# Altium PCB PCB.PcbDoc (part 1 of 2)
Units mil, origin at the board's own origin, x right, y up, seen from the top; angles counter-clockwise.
Board outline 6000 x 4000 mil, 2 copper layers (Top Layer, Bottom Layer); 94 components, 44 nets, 296 pads, 0 vias.
Unrouted connection lines stored in the file: 197.
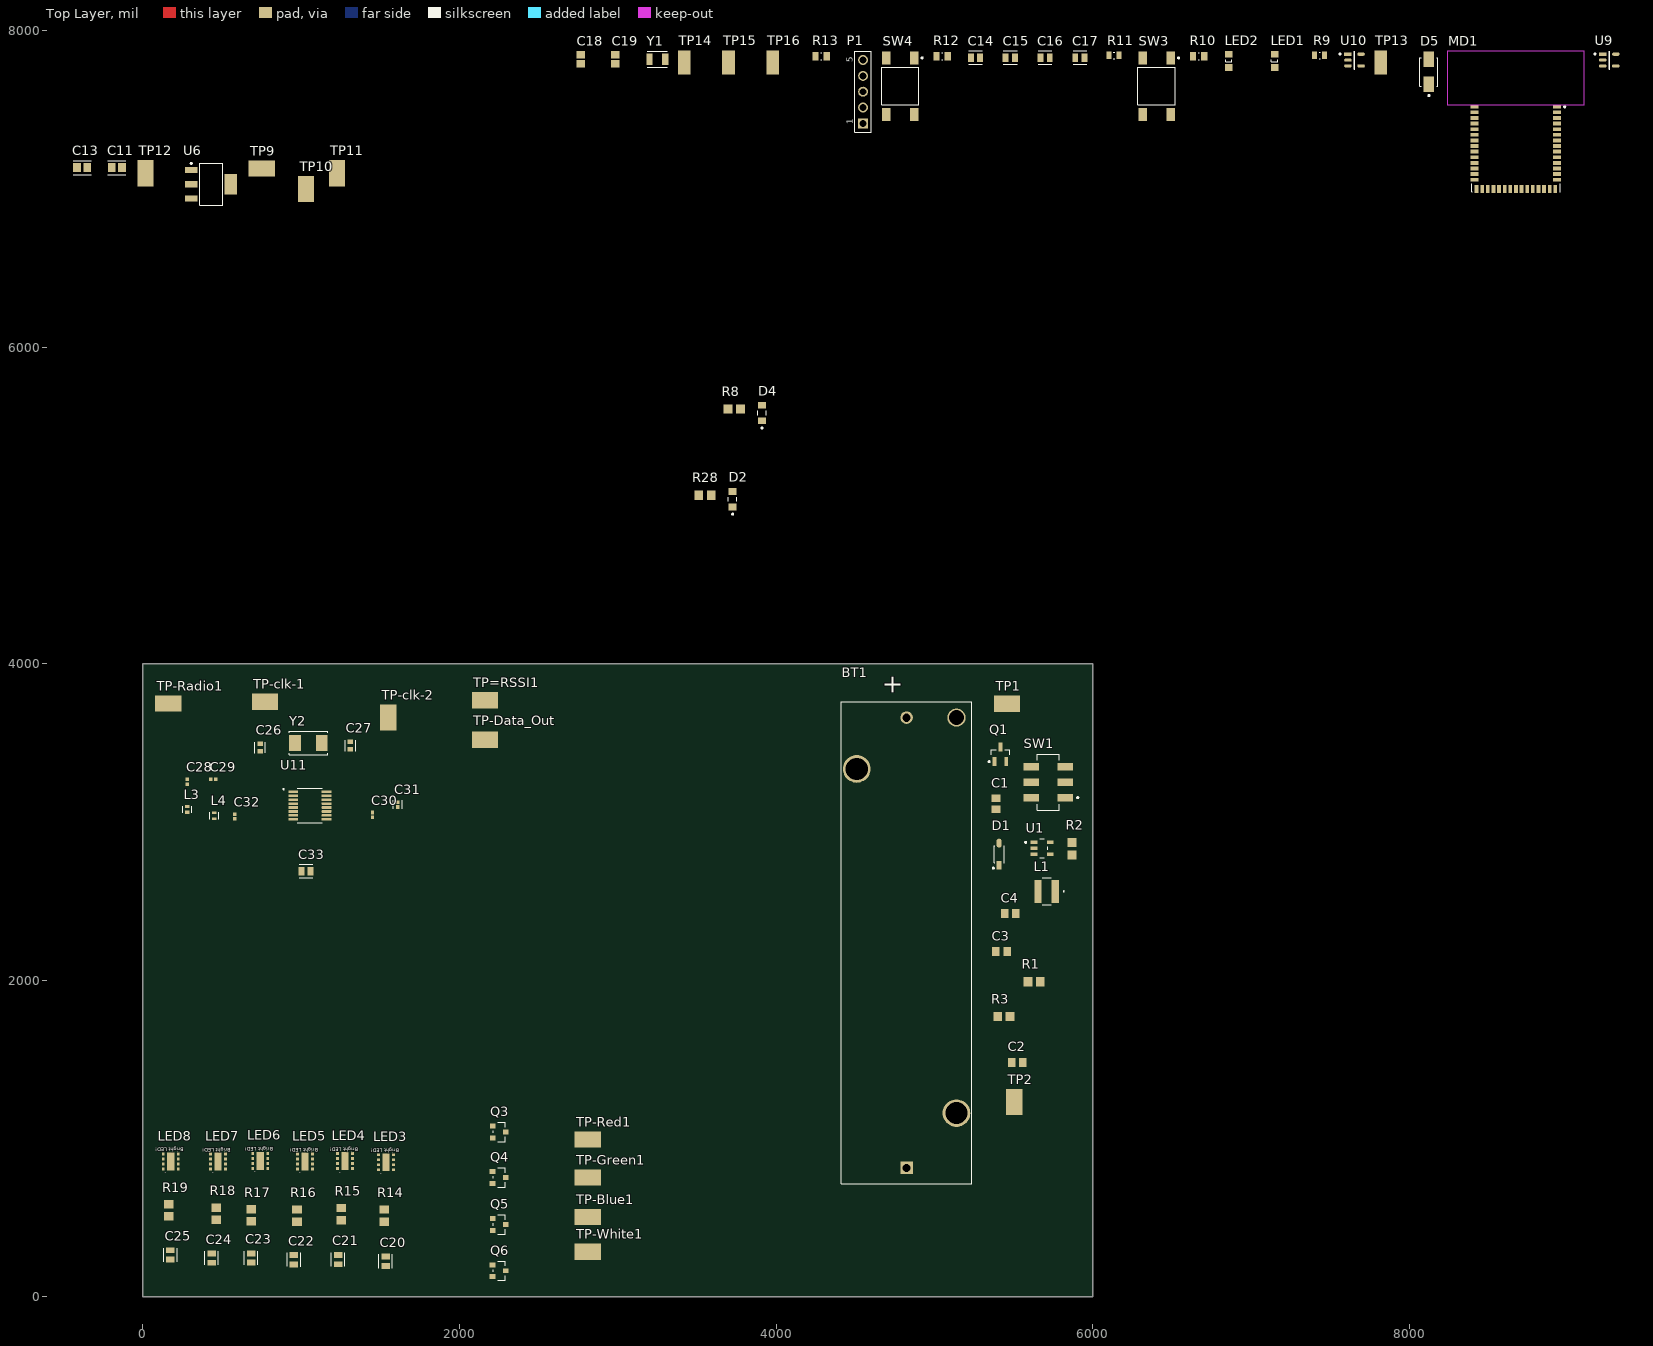
[diagram p0: Top Layer view]
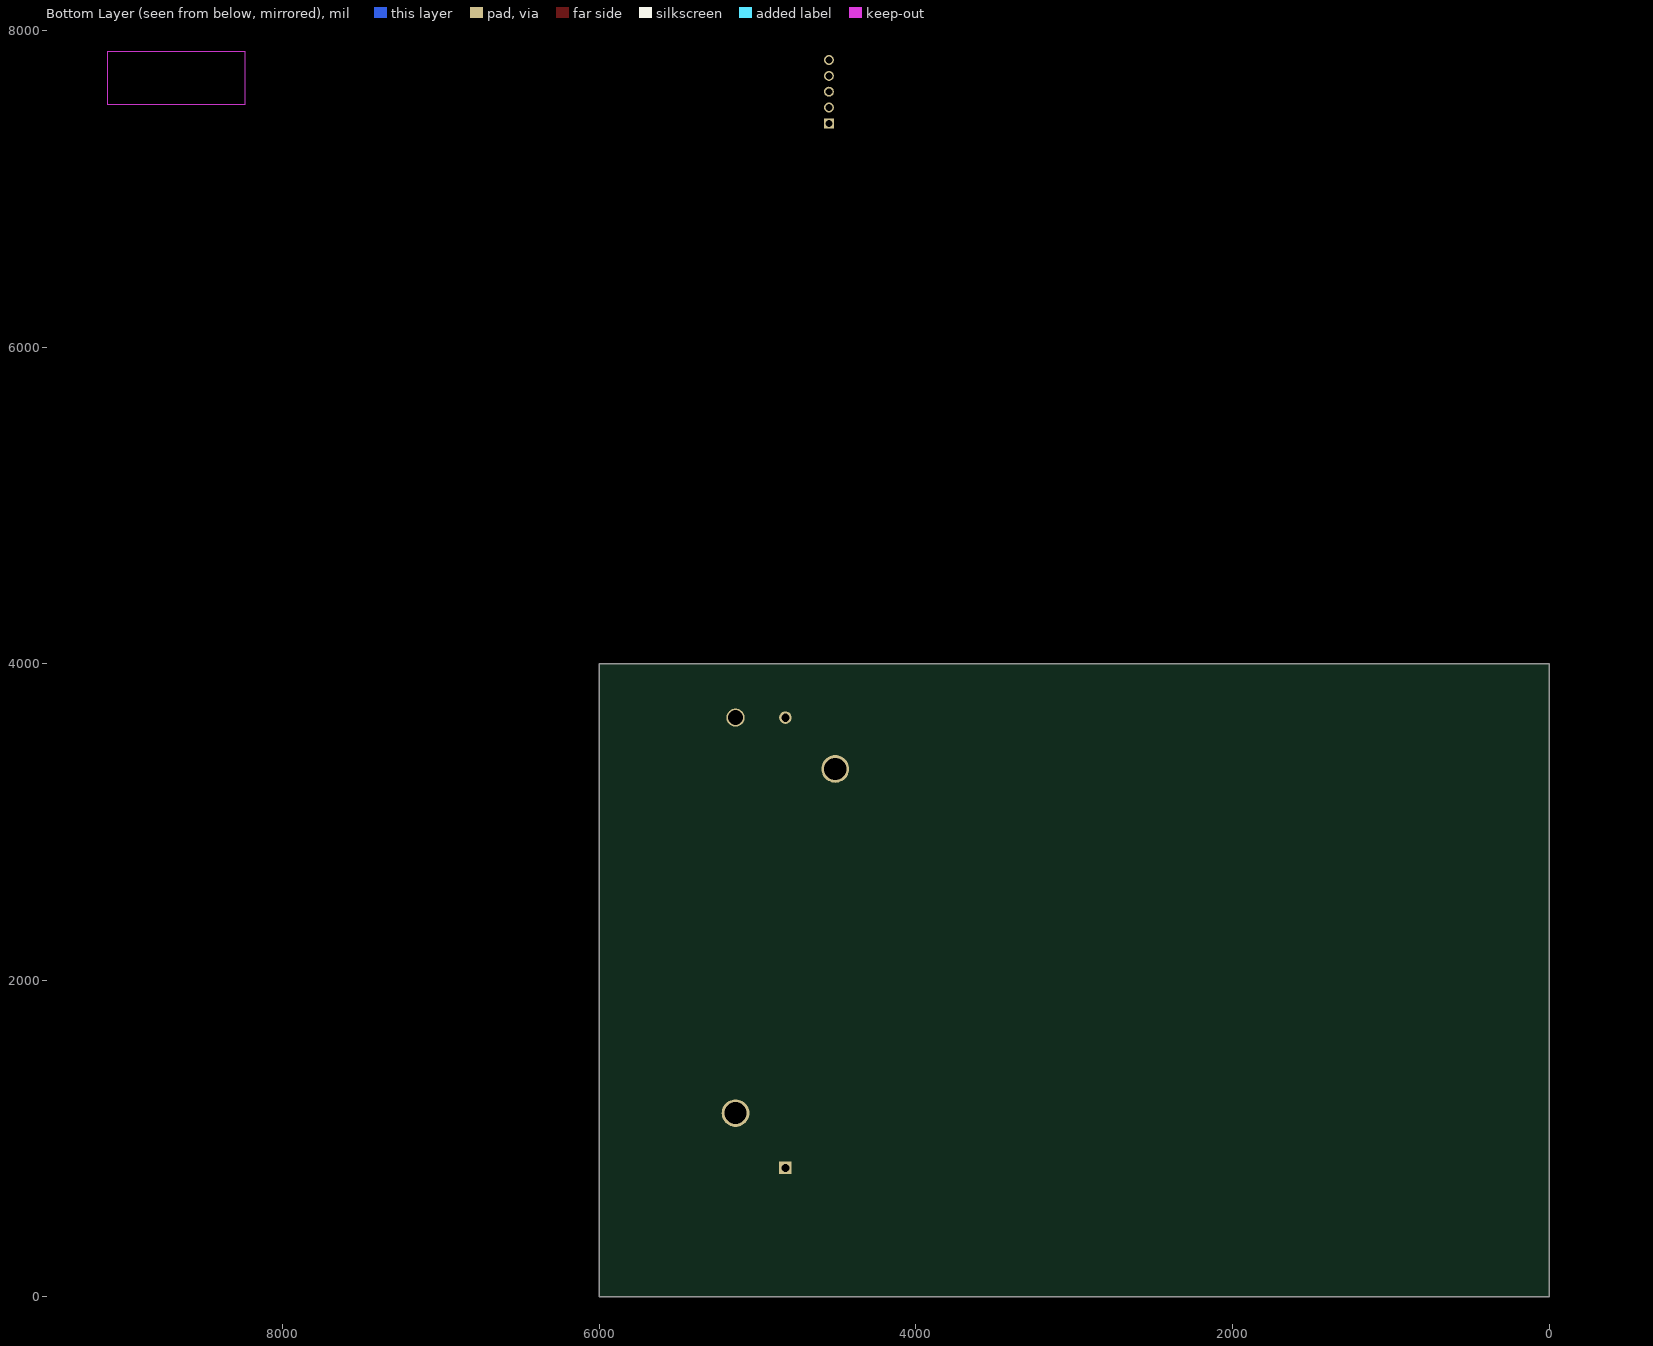
[diagram p1: Bottom Layer view, seen from below]

## Layer stack, top to bottom
Top Solder: solder mask 0.4, Solder Resist, Dk 3.5
Top Layer: signal copper 1.4
Dielectric 1: dielectric 12.6, FR-4, Dk 4.8
Bottom Layer: signal copper 1.4
Bottom Solder: solder mask 0.4, Solder Resist, Dk 3.5

## Board outline
0,0 6000,0 6000,4000 0,4000

## Design rules (kind name [scope] priority, off if disabled: settings)
Clearance [All] p1: gap=10 ignorepadtopadclearanceinfootprint=FALSE except(0: Arc-Hole Track-Hole SMDPad-Hole THPad-Hole Via-Hole Fill-Hole Poly-Hole Region-Hole Text-Hole)
PolygonConnect [All] p1: connectstyle=Relief reliefconductorwidth=10 reliefentries=4 polygonreliefangle="90 Angle" airgapwidth=10
RoomDefinition LED_array [InComponentClass('LED_array')] p1: confinementstyle=ConfineIn formatcopy=TRUE lockcomponents=FALSE outline 24.53,30.2 3350,30.2 3350,1255.2 24.53,1255.2
RoomDefinition 03-5V_To_3V3 [InComponentClass('03-5V_To_3V3')] p2: confinementstyle=ConfineIn formatcopy=TRUE lockcomponents=FALSE outline -465,6870 1390,6870 1390,7290 -465,7290
RoomDefinition 02-Power_5v0 [InComponentClass('02-Power_5v0')] p3: confinementstyle=ConfineIn formatcopy=TRUE lockcomponents=FALSE outline 4390.08,702.42 5945.08,702.42 5945.08,3992.42 4390.08,3992.42
RoomDefinition Receiver [InComponentClass('Receiver')] p4: confinementstyle=ConfineIn formatcopy=TRUE lockcomponents=FALSE outline 10,2589.65 2740,2589.65 2740,3994.65 10,3994.65
RoomDefinition 05-5V_Monitor [InComponentClass('05-5V_Monitor')] p5: confinementstyle=ConfineIn formatcopy=TRUE lockcomponents=FALSE outline 3640.63,5475 4005.63,5475 4005.63,5770 3640.63,5770
RoomDefinition 04-3V3_Monitor [InComponentClass('04-3V3_Monitor')] p6: confinementstyle=ConfineIn formatcopy=TRUE lockcomponents=FALSE outline 3455.63,4930 3820.63,4930 3820.63,5225 3455.63,5225
RoomDefinition 02-MCU [InComponentClass('02-MCU')] p7: confinementstyle=ConfineIn formatcopy=TRUE lockcomponents=FALSE outline 2725,6960 9345,6960 9345,7985 2725,7985
RoutingVias [All] p1: holewidth=28 width=50 viastyle="Through Hole" minholewidth=28 minwidth=50 maxholewidth=28 maxwidth=50
SolderMaskExpansion [All] p1: expansion=4 istentingtop=FALSE
Width [All] p1: maxlimit=10 minlimit=10 preferedwidth=10
30 further rules are at their usual default settings.

## Classes and differential pairs
component class Receiver: C26 C27 C28 C29 C30 C31 C32 C33 L3 L4 RX_ANT1 TP-clk-1 TP-clk-2 TP-Data_Out TP-Radio1 TP=RSSI1 U11 Y2
component class LED_array: C20 C21 C22 C23 C24 C25 LED3 LED4 LED5 LED6 LED7 LED8 Q3 Q4 Q5 Q6 R14 R15 R16 R17 R18 R19 TP-Blue1 TP-Green1 TP-Red1 TP-White1
component class 05-5V_Monitor: D4 R8 U8
component class 04-3V3_Monitor: D2 R28 U?
component class 03-5V_To_3V3: C11 C12 C13 TP9 TP10 TP11 TP12 U6
component class 02-Power_5v0: BT1 C1 C2 C3 C4 D1 L1 Q1 R1 R2 R3 SW1 TP1 TP2 U1
component class 02-MCU: C14 C15 C16 C17 C18 C19 D5 LED1 LED2 MD1 P1 R9 R10 R11 R12 R13 SW3 SW4 TP13 TP14 TP15 TP16 U9 U10 Y1

## Components (designator, comment, footprint, x,y, rotation, side; value= is the part's Value field where it differs from the comment)
BT1 "1043" Keystone_1043_0 4825,2237.5 r90 top
C1 "CAP_0805_U_010_00" CAP_0805 5390.08,3116.56 r90 top value=10µF
C2 "CAP_0805_U_010_00" CAP_0805 5524.65,1481.36 r0 top value=10µF
C3 "CAP_0805_N_001_80" CAP_0805 5424.65,2181.99 r0 top
C4 "CAP_0805_U_010_00" CAP_0805 5480.08,2421.99 r180 top value=10µF
C11 "CL21A106KQCLNNC" FP-CL21-IPC_B -165,7135 r0 top
C13 "CL21A106KQCLNNC" FP-CL21-IPC_B -385,7135 r0 top
C14 "C0805C106K8PACTU" FP-C0805C-DG-MFG 5260,7830 r0 top value=10uF
C15 "C0805C106K8PACTU" FP-C0805C-DG-MFG 5480,7830 r0 top value=10uF
C16 "C0805C104K5RACTU" FP-C0805C-DN-MFG 5700,7830 r0 top value="0.10 μF"
C17 "C0805C104K5RACTU" FP-C0805C-DN-MFG 5920,7830 r0 top value="0.10 μF"
C18 "08055A6R0CAT2A" CAPC2013X94X50LL20T25 2765,7820 r90 top
C19 "08055A6R0CAT2A" CAPC2013X94X50LL20T25 2985,7820 r90 top
C20 "10uF" FP-C0805C-DG-MFG 1533.39,225.67 r270 top
C21 "10uF" FP-C0805C-DG-MFG 1233.39,235.67 r270 top
C22 "10uF" FP-C0805C-DG-MFG 953.39,235.2 r270 top
C23 "10uF" FP-C0805C-DG-MFG 683.39,245.67 r270 top
C24 "10uF" FP-C0805C-DG-MFG 433.39,245.2 r270 top
C25 "10uF" FP-C0805C-DG-MFG 173.39,265.2 r270 top
C26 "10pF" FP-C0603C-CF-MFG 740,3471.02 r90 top value="10 pF"
C27 "10pF" FP-C0603C-CF-MFG 1310,3483.62 r270 top value="10 pF"
C28 "1.2pF" CAPC1005X55X25LL05T10 280,3255.35 r90 top
C29 "1.2pF" CAPC1005X55X25LL05T10 444.65,3270 r0 top
C30 "0.1uF" CAPC1005X56X25LL10T15 1450,3045.35 r270 top
C31 "4.7uF" FP-C1005-050-0_15-IPC_C 1610,3110 r270 top
C32 "0.1uF" CAPC1005X56X25LL10T15 580,3035.35 r270 top
C33 "10uF" FP-C0805C-DG-MFG 1030,2690 r0 top
D1 "SM5817PL-TP" On_Semiconductor_425-04_IPC_A 5409.45,2797.42 r90 top
D2 "LTST-C171KGKT" FP-LTST-C171KGKT-MFG 3725.63,5040 r90 top
D4 "LTST-C171KGKT" FP-LTST-C171KGKT-MFG 3910.63,5585 r90 top
D5 "B140-13-F" FP-SMA-MFG 8125,7740 r90 top
L1 "NRS4018T2R2MDGJ" IND_TAIYO_NRS4018_TAY 5710.08,2562.42 r180 top
L3 "77nH" FP-LQW15CN_10-MFG 280,3080 r90 top
L4 "39nH" FP-LQW15AN_80-MFG 450,3040 r90 top
LED1 "150080RS75000" 0805_A 7150,7810 r90 top
LED2 "150080GS75000" 0805_A 6860,7810 r90 top
LED3 "QLSP06RGBXWAJ" QLSP06RGBXWAJ 1544.02,900.16 r180 top
LED4 "QLSP06RGBXWAJ" QLSP06RGBXWAJ 1284.02,907.17 r180 top
LED5 "QLSP06RGBXWAJ" QLSP06RGBXWAJ 1031.26,904.41 r180 top
LED6 "QLSP06RGBXWAJ" QLSP06RGBXWAJ 748.5,908.66 r180 top
LED7 "QLSP06RGBXWAJ" QLSP06RGBXWAJ 481.26,904.41 r180 top
LED8 "QLSP06RGBXWAJ" QLSP06RGBXWAJ 183.39,905.2 r180 top
MD1 "CYBLE-416045-02" FP-CYBLE-416045-02-MFG 8675,7350 r0 top
P1 "61300511121" 61300511121 4550,7615 r90 top
Q1 "SSM3J328R,LF" SOT-23_M 5417.48,3428.25 r90 top
Q3 "SSM3K329R,LF" FP-2-3Z1A-MFG 2251.34,1042.6 r0 top
Q4 "SSM3K329R,LF" FP-2-3Z1A-MFG 2250,755.2 r0 top
Q5 "SSM3K329R,LF" FP-2-3Z1A-MFG 2251.34,457.8 r0 top
Q6 "SSM3K329R,LF" FP-2-3Z1A-MFG 2250,165.2 r0 top
R1 "30K" RES_0805 5630.71,1991.99 r180 top
R2 "RES_0805_K_010.00" RES_0805 5870.08,2831.99 r90 top
R3 "RES_0805_K_010.00" RES_0805 5439.45,1771.99 r180 top
R8 "330" RES_0805 3735.63,5610 r0 top
R9 "RC0805FR-07330RL" RESC2013X60X35LL10T20 7435,7845 r0 top
R10 "RC0805FR-0710KL" RESC2013X60X35NL10T20 6670,7840 r0 top
R11 "RC0805FR-07330RL" RESC2013X60X35LL10T20 6135,7845 r0 top
R12 "RC0805FR-0710KL" RESC2013X60X35NL10T20 5050,7840 r0 top
R13 "RC0805FR-0710KL" RESC2013X60X35NL10T20 4285,7840 r0 top
R14 "10Ohm" RESC2013X50X40ML20T20 1523.39,513.58 r90 top
R15 "10Ohm" RESC2013X50X40ML20T20 1253.39,523.58 r90 top
R16 "10Ohm" RESC2013X50X40ML20T20 973.39,513.58 r90 top
R17 "10Ohm" RESC2013X50X40ML20T20 683.39,515.2 r90 top
R18 "10Ohm" RESC2013X50X40ML20T20 463.39,525.2 r90 top
R19 "10Ohm" RESC2013X50X40ML20T20 163.39,546.81 r90 top
R28 "330" RES_0805 3550.63,5065 r0 top
SW1 "JS202011SCQN" C&K_Components_0_MFG 5720.08,3251.99 r90 top
SW3 "FSM4JSMA" TECO-FSM4JSMA_V 6405,7650 r0 top
SW4 "FSM4JSMA" TECO-FSM4JSMA_V 4785,7650 r0 top
TP1 "TP_1206" TP-SMC-1206 5459.45,3747.42 r0 top
TP2 "TP_1206" TP-SMC-1206 5504.65,1231.36 r90 top
TP9 "TP_1206" TP-SMC-1206 750,7130 r0 top
TP10 "TP_1206" TP-SMC-1206 1030,7000 r90 top
TP11 "TP_1206" TP-SMC-1206 1225,7100 r90 top
TP12 "TP_1206" TP-SMC-1206 15,7100 r90 top
TP13 "5019" KSTN-5019_V 7820,7800 r90 top
TP14 "5019" KSTN-5019_V 3420,7800 r90 top
TP15 "5019" KSTN-5019_V 3700,7800 r90 top
TP16 "5019" KSTN-5019_V 3980,7800 r90 top
TP-Blue1 "TP_1206" TP-SMC-1206 2810,505.2 r180 top
TP-clk-1 "TP_1206" TP-SMC-1206 770,3760 r180 top
TP-clk-2 "TP_1206" TP-SMC-1206 1550,3660 r90 top
TP-Data_Out "TP_1206" TP-SMC-1206 2160,3520 r180 top
TP-Green1 "TP_1206" TP-SMC-1206 2810,755.2 r180 top
TP-Radio1 "TP_1206" TP-SMC-1206 160,3750 r0 top
TP-Red1 "TP_1206" TP-SMC-1206 2810,995.2 r180 top
TP-White1 "TP_1206" TP-SMC-1206 2810,285.2 r180 top
TP=RSSI1 "TP_1206" TP-SMC-1206 2160,3770 r180 top
U1 "LM2735XMF-NOPB" Texas_Instruments_DBV0005A_0 5681.26,2834.59 r0 top
U6 "TLV1117LV33DCYT" DCY0004A_M 430,7030 r0 top
U9 "SN74AHC1G08DBV3" FP-DBV0005A-IPC_C 9265,7815 r0 top
U10 "SN74AHC1G08DBV3" FP-DBV0005A-IPC_C 7655,7815 r0 top
U11 "MICRF220AYQS" SOP63P600X175-16N 1055,3104.65 r0 top
Y1 "32.768KHZ" FP-ABS07-120-MFG 3250,7820 r0 top
Y2 "9.81563MHz" FP-ABM7-MFG 1044.79,3499.65 r0 top

## Footprints (in the part's own frame and the unit in brackets; to place one, negate y for a bottom-side part, rotate by r counter-clockwise, add the part's x,y. Pads: shape width x height; smd on the part's side, far side on the other; paste and mask are expansions set on the pad)
0805_A [mm] "Chip LED, 2-Leads, Body 2.0x1.3mm, IPC Medium Density"
  rect 1.1x1.2 smd: 1(-1.05,0) 2(1.05,0)
  silkscreen extent -0.15,-0.5 0.15,0.5, body extent -1,-0.62 1,0.63, height 0.68
61300511121 [mm] "Pin Header, pitch 2.54 mm, THT, Vertical, single row, 5p"
  rect 1.6x1.6 hole 1.1: 1(-5.08,0)
  round 1.6 hole 1.1: 2(-2.54,0) 3(0,0) 4(2.54,0) 5(5.08,0)
  silkscreen extent -6.5,-1.35 6.5,1.35, body extent -6.35,-1.27 6.35,1.27, height 8.57
C&K_Components_0_MFG [mm]
  rect 1.2x2.5 smd paste+0 mask+0: 1(-2.5,-2.75) 2(0,-2.75) 3(2.5,-2.75) 4(-2.5,2.75) 5(0,2.75) 6(2.5,2.75)
  silkscreen extent -4.5,-4.85 4.5,1.8, body extent -4.5,-3.75 4.5,3.75, height 5.51
CAP_0805 [mm]
  rect 1.2x1.4 smd: 1(-0.9,0) 2(0.9,0)
  body extent -1.07,-0.7 1.07,0.7, height 0.7
CAPC1005X55X25LL05T10 [mm] "Chip Capacitor, 2-Leads, Body 1.00x0.50mm, IPC High Density"
  rect 0.56x0.52 smd: 1(-0.39,0) 2(0.39,0)
  body extent -0.53,-0.28 0.53,0.28, height 0.55
CAPC1005X56X25LL10T15 [mm] "Chip Capacitor, 2-Leads, Body 1.00x0.50mm, IPC High Density"
  rect 0.58x0.54 smd: 1(-0.39,0) 2(0.39,0)
  body extent -0.55,-0.3 0.55,0.3, height 0.56
CAPC2013X94X50LL20T25 [mm] "Chip Capacitor, 2-Leads, Body 2.01x1.25mm, IPC High Density"
  rect 1.15x1.35 smd: 1(-0.725,0) 2(0.725,0)
  body extent -1.1,-0.72 1.1,0.72, height 0.94
DCY0004A_M [mm] "SOT223, 4-Leads, Body 6.7x3.7mm, Pitch 2.3mm, IPC Low Density"
  rrect10% 2.05x1 smd: 1(-3.175,2.3) 2(-3.175,0) 3(-3.175,-2.3)
  rrect5% 2.05x3.25 smd: 4(3.175,0)
  silkscreen extent -3.3,-3.35 1.85,3.47, body extent -3.5,-3.25 3.5,3.25, height 1.62
FP-2-3Z1A-MFG [mm]
  rect 0.9x0.8 smd paste+0 mask+0: 1(-1.05,0.95) 2(-1.05,-0.95) 3(1.05,0)
  silkscreen extent -0.95,-1.55 0.95,1.55, body extent -1.6,-1.65 1.6,1.65, height 0.25
FP-ABM7-MFG [mm]
  rect 1.9x2.6 smd paste+0 mask+0: 1(-2.15,0) 2(2.15,0)
  silkscreen extent -3.1,-1.85 3.1,1.85, body extent -3.2,-1.95 3.2,1.95, height 0.25
FP-ABS07-120-MFG [mm]
  rect 1x1.8 smd paste+0 mask+0: 1(-1.25,0) 2(1.25,0)
  silkscreen extent -1.6,-1.3 1.6,1.3, body extent -1.85,-1 1.85,1, height 0.25
FP-C0603C-CF-MFG [mm]
  rect 0.75x0.9 smd paste+0 mask+0: 1(-0.6,0) 2(0.6,0)
  silkscreen extent -0.87,-0.85 0.88,0.85, body extent -1.2,-0.6 1.2,0.6, height 0.25
FP-C0805C-DG-MFG [mm]
  rect 0.95x1.35 smd paste+0 mask+0: 1(-0.75,0) 2(0.75,0)
  silkscreen extent -1.11,-1.08 1.1,1.07, body extent -1.4,-0.85 1.4,0.85, height 0.25
FP-C0805C-DN-MFG [mm]
  rect 0.95x1.35 smd paste+0 mask+0: 1(-0.75,0) 2(0.75,0)
  silkscreen extent -1.1,-1.07 1.1,1.07, body extent -1.4,-0.85 1.4,0.85, height 0.25
FP-C1005-050-0_15-IPC_C [mil]
  rect 23.82x22.04 smd paste+0 mask+0: 1(-14.86,0) 2(14.86,0)
  silkscreen extent -27,-29 27,29, body extent -31,-17 31,17, height 10
FP-CL21-IPC_B [mil]
  rect 49.4x57.33 smd paste+0 mask+0: 1(-32.51,0) 2(32.51,0)
  silkscreen extent -57,-44 57,44, body extent -67,-39 67,39, height 10
FP-CYBLE-416045-02-MFG [mm]
  rect 1.27x0.61 smd paste+0 mask+0: 1(6.619,4.32) 2(6.619,3.42) 3(6.619,2.52) 4(6.619,1.62) 5(6.619,0.71) 6(6.619,-0.19) 7(6.619,-1.09) 8(6.619,-1.99) 9(6.619,-2.89) 10(6.619,-3.79) 11(6.619,-4.7) 12(6.619,-5.6) 13(6.619,-6.5) 14(6.619,-7.4) 30(-6.619,-7.4) 31(-6.619,-6.5) 32(-6.619,-5.6) 33(-6.619,-4.7) 34(-6.619,-3.79) 35(-6.619,-2.89) 36(-6.619,-1.99) 37(-6.619,-1.09) 38(-6.619,-0.19) 39(-6.619,0.71) 40(-6.619,1.62) 41(-6.619,2.52) 42(-6.619,3.42) 43(-6.619,4.32)
  rect 0.61x1.27 smd paste+0 mask+0: 15(6.31,-8.869) 16(5.41,-8.869) 17(4.51,-8.869) 18(3.61,-8.869) 19(2.71,-8.869) 20(1.8,-8.869) 21(0.9,-8.869) 22(0,-8.869) 23(-0.9,-8.869) 24(-1.8,-8.869) 25(-2.7,-8.869) 26(-3.61,-8.869) 27(-4.51,-8.869) 28(-5.41,-8.869) 29(-6.31,-8.869)
  Keep-Out Layer region: -11,4.63 11,4.63 11,13.25 -11,13.25
  Keep-Out Layer region: -11,4.63 11,4.63 11,13.25 -11,13.25
  silkscreen extent -7.07,-9.33 7.95,4.43, body extent -11,-9.6 11,13.25, height 0.25
FP-DBV0005A-IPC_C [mm]
  rect 1.205x0.532 smd paste+0 mask+0: 1(-1.05,0.95)
  rrect100% 1.205x0.532 smd paste+0 mask+0: 2(-1.05,0) 3(-1.05,-0.95) 4(1.05,-0.95) 5(1.05,0.95)
  silkscreen extent -2.45,-1.45 0.05,1.45, body extent -1.75,-1.55 1.75,1.55, height 0.25
FP-LQW15AN_80-MFG [mm]
  rect 0.41x0.66 smd paste+0 mask+0: 1(-0.505,0) 2(0.505,0)
  silkscreen extent -0.56,-0.74 0.55,0.75, body extent -0.81,-0.45 0.81,0.45, height 0.25
FP-LQW15CN_10-MFG [mm]
  rect 0.5x0.66 smd paste+0 mask+0: 1(-0.45,0) 2(0.45,0)
  silkscreen extent -0.55,-0.75 0.55,0.75, body extent -0.8,-0.43 0.8,0.43, height 0.25
FP-LTST-C171KGKT-MFG [mm]
  rect 1.1x1.25 smd paste+0 mask+0: 1(-1.25,0) 2(1.25,0)
  silkscreen extent -2.52,-0.67 0.33,0.67, body extent -1.9,-0.77 1.9,0.77, height 0.25
FP-SMA-MFG [mm]
  rect 2.5x1.7 smd paste+0 mask+0: 1(-2,0) 2(2,0)
  silkscreen extent -3.92,-1.46 2.3,1.46, body extent -3.35,-1.56 3.35,1.56, height 0.25
IND_TAIYO_NRS4018_TAY [mil]
  rect 47x146 smd paste+0 mask+0: 1(-55,0) 2(55,0)
  silkscreen extent -112,-86 28,86, body extent -81,-81 81,81, height 71
Keystone_1043_0 [mil]
  rect 79.53x79.53 hole 52 paste-39370.1 mask+0: 1(-1422.5,0)
  round 79.53 hole 52 paste-39370.1 mask+0: 2(1422.5,0)
  round 175 hole 140 unplated paste-39370.1 mask+0: ""(-1076.5,-315) ""(1098.5,315)
  round 115 hole 94 unplated paste-39370.1 mask+0: ""(1422.5,-315)
  silkscreen extent -1522,-412 1522,412, body extent -1526,-415 1526,415, height 10
KSTN-5019_V [mm] "Test Point, 1-Leads, Body 3.81x2.03mm"
  rect 3.8x2.03 smd: 1(0,0)
  body extent -1.9,-1.01 1.9,1.02, height 2.29
On_Semiconductor_425-04_IPC_A [mm]
  rect 1.408x0.822 smd paste+0 mask+0: 1(-1.78,0)
  rrect100% 1.408x0.822 smd paste+0 mask+0: 2(1.78,0)
  silkscreen extent -2.37,-0.8 1.35,1.04, body extent -2.98,-1.3 2.98,1.3, height 0.25
QLSP06RGBXWAJ [mm] "LED!"
  rect 0.45x0.45 smd: 1(1.4,2.45) 2(1.4,1.65) 3(1.4,0.85) 4(1.4,0.05) 5(-1,0.05) 6(-1,0.85) 7(-1,1.65) 8(-1,2.45)
  rect 1.15x2.85 smd: 5(0.2,1.25)
RES_0805 [mm]
  rect 1.4x1.5 smd: 1(-1,0) 2(1,0)
  body extent -1.07,-0.7 1.07,0.7, height 0.7
RESC2013X50X40ML20T20 [mm] "Chip Resistor, 2-Leads, Body 2.00x1.25mm, IPC Low Density"
  rect 1.35x1.55 smd: 1(-0.975,0) 2(0.975,0)
  body extent -1.1,-0.72 1.1,0.72, height 0.5
RESC2013X60X35LL10T20 [mm] "Chip Resistor, 2-Leads, Body 2.1x1.35mm, IPC High Density"
  rect 0.8x1.25 smd: 1(-0.8,0) 2(0.8,0)
  silkscreen extent -0.1,-0.53 0.1,0.53, body extent -1.05,-0.67 1.05,0.68, height 0.6
RESC2013X60X35NL10T20 [mm] "Chip Resistor, 2-Leads, Body 2.1x1.35mm, IPC Medium Density"
  rect 1x1.35 smd: 1(-0.9,0) 2(0.9,0)
  silkscreen extent -0.1,-0.58 0.1,0.58, body extent -1.05,-0.68 1.05,0.67, height 0.6
SOP63P600X175-16N [mm]
  rrect25% 1.57x0.41 smd: 1(-2.67,2.222) 2(-2.67,1.587) 3(-2.67,0.953) 4(-2.67,0.318) 5(-2.67,-0.318) 6(-2.67,-0.953) 7(-2.67,-1.587) 8(-2.67,-2.222) 9(2.67,-2.222) 10(2.67,-1.587) 11(2.67,-0.953) 12(2.67,-0.318) 13(2.67,0.318) 14(2.67,0.953) 15(2.67,1.587) 16(2.67,2.222)
  silkscreen extent -4.34,-2.75 2,2.75, body extent -5,-5 5,5, height 142
SOT-23_M [mm]
  rect 1.45x0.6 smd: 1(-1.175,0.95) 2(-1.175,-0.95) 3(1.175,0)
  silkscreen extent -1.3,-1.5 0.7,1.92, body extent -0.7,-1.5 0.7,1.5, height 1.1
TECO-FSM4JSMA_V [mm] "SMD, 4-Leads, Body 6x6mm, Pitch 4.5mm"
  rect 1.4x2.1 smd: 1(2.25,4.55) 2(2.25,-4.55) 3(-2.25,4.55) 4(-2.25,-4.55)
  silkscreen extent -3,-3 3.63,4.67, body extent -3,-5 3,5, height 5.08
Texas_Instruments_DBV0005A_0 [mm]
  rrect17% 1.1x0.6 smd paste+0 mask+0: 1(-1.3,0.95) 2(-1.3,0) 3(-1.3,-0.95) 4(1.3,-0.95) 5(1.3,0.95)
  silkscreen extent -2.77,-1.53 0.87,1.53, body extent -1.95,-1.63 1.95,1.63, height 0.25
TP-SMC-1206 [mm]
  rect 4.2x2.6 smd mask+0: 1(0,0)
  body extent -1.57,-0.79 1.63,0.81, height 1.22

## Part data
BT1: "Cylindrical Battery Contacts, Clips, Holders & Springs 18650 PCB PLASTIC BATT HLDR THM 1 CELL", Manufacturer 1="Keystone Electronics", Max Operating Temperature=145°C, Min Operating Temperature=-50°C, Package Quantity=100, Supplier Part Number 1=36-1043-ND, Body Material=Nylon, Category="Passive Components", ComponentLink1Description=https://datasheet.ciiva.com/4/1043-4710.pdf?src-supplier=Digi-Key, ComponentLink1URL=https://datasheet.ciiva.com/4/1043-4710.pdf?src-supplier=Digi-Key, ComponentLink2Description=https://datasheet.ciiva.com/3353/1043-eng-tds-3353208.pdf?src-supplier=Distrelec, ComponentLink2URL=https://datasheet.ciiva.com/3353/1043-eng-tds-3353208.pdf?src-supplier=Distrelec, ComponentLink3Description=https://datasheet.ciiva.com/41803/1043-41803215.pdf?src-supplier=Digi-Key, ComponentLink3URL=https://datasheet.ciiva.com/41803/1043-41803215.pdf?src-supplier=Digi-Key, ComponentLink4Description=https://datasheet.ciiva.com/4642/1043-4642493.pdf?src-supplier=Mouser, ComponentLink4URL=https://datasheet.ciiva.com/4642/1043-4642493.pdf?src-supplier=Mouser, Contact Material="Stainless Steel", Contact Plating=Gold, Manufacturer Part Number 1=1043, Material=Nylon, Mount="Through Hole,PCB", Number of Cells=1, Number of Pins=1, Packaging=Tray, Pricing 1="1=3.00000, 25=2.52400, 100=2.08850, 250=1.92020, 500=1.80144 (USD)", RoHS=Yes, Stock 1=3564, Supplier 1=Digi-Key, Termination="PC Pin"
C1 C2 C4: "CAP CER 10UF 10V X5R 0805", Manufacturer="Samsung Electro-Mechanics America, Inc.", Manufacturer Part Number=CL21A106KPCLQNC, Operating Temperature="-55°C ~ 85°C", Package / Case="0805 (2012 Metric)", Ratings=-, Supplier Part Number 1=1276-2402-1-ND, Temperature Coefficient=X5R, Tolerance=±10%, Voltage - Rated=10V, Applications="General Purpose", Category=Capacitors, ComponentLink1Description=http://media.digikey.com/pdf/Data%20Sheets/Samsung%20PDFs/CL21A106KPCLQNC_character.pdf, ComponentLink1URL=http://media.digikey.com/pdf/Data%20Sheets/Samsung%20PDFs/CL21A106KPCLQNC_character.pdf, Features=-, Height - Seated (Max)=-, Lead Spacing=-, Lead Style=-, Mounting Type="Surface Mount, MLCC", Packaging="Cut Tape (CT)", Pricing 1="1=0.2, 10=0.14, 25=0.1052, 50=0.0806, 100=0.0665, 500=0.0469, 1000=0.0385 (USD)", RoHS="RoHS Compliant", Size / Dimension="0.079\" L x 0.049\" W (2.00mm x 1.25mm)", Stock 1=97192, Supplier 1=Digi-Key, Thickness (Max)="0.037\" (0.95mm)"
C3: "MURATA - GRM2165C1H182JA01D - SMD Multilayer Ceramic Capacitor, 1800 pF, 50 V, 0805 [2012 Metric], ± 5%, C0G / NP0, GRM Series", Capacitance=1.8nF, Case Code (Imperial)=0805, Case Code (Metric)=2012, Dielectric=C0G, Manufacturer 1=Murata, Manufacturer Part Number 1=GRM2165C1H182JA01D, Max Operating Temperature=125°C, Min Operating Temperature=-55°C, Package Quantity=1, Supplier Part Number 1=490-1626-1-ND, Temperature Coefficient=30ppm/°C, Tolerance=5%, Voltage=50V, Case/Package=0805, Category="Ceramic Capacitors", ComponentLink1Description=https://datasheet.ciiva.com/25730/cl21a106kpclqnc-25730594.pdf, ComponentLink1URL=https://datasheet.ciiva.com/25730/cl21a106kpclqnc-25730594.pdf, ComponentLink2Description=https://datasheet.ciiva.com/134/partnumbering-e-01-134098.pdf?src-supplier=Digi-Key, ComponentLink2URL=https://datasheet.ciiva.com/134/partnumbering-e-01-134098.pdf?src-supplier=Digi-Key, ComponentLink3Description=https://datasheet.ciiva.com/26920/getdatasheetpartid-355170-26920201.pdf, ComponentLink3URL=https://datasheet.ciiva.com/26920/getdatasheetpartid-355170-26920201.pdf, ComponentLink4Description=https://datasheet.ciiva.com/134/partnumbering-e-01-134100.pdf?src-supplier=Digi-Key, ComponentLink4URL=https://datasheet.ciiva.com/134/partnumbering-e-01-134100.pdf?src-supplier=Digi-Key, ComponentLink5Description=https://datasheet.ciiva.com/134/partnumbering-e-01-134099.pdf?src-supplier=Digi-Key, ComponentLink5URL=https://datasheet.ciiva.com/134/partnumbering-e-01-134099.pdf?src-supplier=Digi-Key, Construction=Flat, Depth=1.25mm, Height=0.6mm, Lead Free="Lead Free", Length=2mm, Mount="Surface Mount", Packaging="Tape and Reel", Pricing 1="1=0.20000, 10=0.14000, 50=0.08380, 100=0.07080, 500=0.04844, 1000=0.04285 (USD)", Radiation Hardening=No, REACH SVHC="No SVHC", RoHS=Yes, RoHS Compliant=Yes, Series=GRM, Stock 1=44565, Supplier 1=Digi-Key, Termination=SMD/SMT, Thickness=0.028inch, Voltage Rating=50V, Voltage Rating (DC)=50V, Width=0.049inch
C11 C13: library part CMP-13271-003047-1, "CL21 Series 0805 10uF 6.3V ±10% Tolerance X5R Multilayer Ceramic Chip Capacitor", Capacitance=10uF, Case Code (Imperial)=0805, Case Code (Metric)=2012, Dielectric=X5R, Max Operating Temperature=85°C, Min Operating Temperature=-55°C, Package Quantity=1, Tolerance=10%, Voltage Rating=6.3V, Case/Package=0805, Depth=1.25mm, Height=0.85mm, Lead Free="Lead Free", Length=2mm, Mount="Surface Mount", Packaging="Tape and Reel", Radiation Hardening=No, Thickness=0.037inch, Width=0.049inch
C14 C15: library part CMP-2007-03243-2, "CAP CER 10UF 10V X5R 0805", 3DS Part Number=220-00001, Capacitance=10uF, Case Code (Imperial)=0805, Case Code (Metric)=2012, Dielectric=X5R, Dielectric Material=Ceramic, Manufacturer=Kemet, Manufacturer 1=KEMET, Max Operating Temperature=85°C, Min Operating Temperature=-55°C, Package=C0805C-DG, Package Quantity=1, Supplier Part Number 1=399-C0805C106K8PAC7800CT-ND, Temperature="-55°C to +85°C", Temperature Coefficient=15%, Temperature Range High=+85°C, Tolerance=10%, Voltage=10V, Automotive=No, Case/Package=0805, Category=Cap, ComponentLink2Description=Datasheet, ComponentLink2URL=https://content.kemet.com/datasheets/KEM_C1006_X5R_SMD.pdf, Construction=Flat, Contact Plating=Tin,Matte, Depth=1.25mm, Device Class L1="Passive Components", Device Class L2=Capacitors, Device Class L3="Ceramic Capacitors", Digikey Description="CAP CER 10UF 10V X5R 0805", Dissipation Factor=10%, Height=1.4mm, Ipc Land Pattern Name=CAPC200125X125, Lead Free=Yes, Length=2mm, Manufacturer Part Number=C0805C106K8PACTU, Manufacturer Part Number 1=C0805C106K8PACTU, Material=Ceramic, Mount="Surface Mount", Mouser Description="CAP CER 10UF 10V X5R 0805", Number of Pins=2, Octopart=https://octopart.com/c0805c106k8pactu-kemet-98697, Packaging="Tape and Reel", Pricing 1="1=0.14000, 10=0.10300, 50=0.05840, 100=0.04830, 500=0.03388, 1000=0.02805 (USD)", Radiation Hardening=No, REACH SVHC="No SVHC", RoHS=TRUE, RoHS Compliant=Yes, Series=C, Stock 1=8631846, Supplier 1=Digi-Key, Temperature Characteristic=X5R, Temperature Range Low=-55°C, Termination=SMD/SMT, Thickness=0.055inch, Voltage Rating=10V, Voltage Rating (DC)=10V, Width=1.2mm
C16 C17: library part CMP-2007-00279-2, "CAP CER 0.1UF 50V X7R 0805", Capacitance="0.10 μF", Case Code (Imperial)=0805, Case Code (Metric)=2012, Dielectric=X7R, Dielectric Material=Ceramic, Manufacturer=KEMET, Max Operating Temperature=125°C, Min Operating Temperature=-55°C, Package=C0805C-DN, Package Quantity=4000, Supplier Part Number 1=399-C0805C104K5RAC7800CT-ND, Temperature="-55°C to +125°C", Temperature Coefficient=30ppm/°C, Temperature Range High=+125°C, Tolerance=0.1, Voltage=500V, Voltage Rating="50 V", Voltage Rating (DC)=50V, Automotive=No, Case/Package=0805, Category=Cap, ComponentLink2Description=Datasheet, ComponentLink2URL=https://content.kemet.com/datasheets/KEM_C1003_C0G_SMD.pdf, Construction=Flat, Contact Plating=Tin,Matte, Depth=1.25mm, Device Class L1="Passive Components", Device Class L2=Capacitors, Device Class L3="Ceramic Capacitors", Digikey Description="CAP CER 0.1UF 50V X7R 0805", Height=0.88mm, Ipc Land Pattern Name=CAPC200125X78, Lead Free=Yes, Lead Pitch=0.75mm, Length=2mm, Manufacturer 1=KEMET, Manufacturer Part Number=C0805C104K5RACTU, Manufacturer Part Number 1=C0805C104K5RACTU, Material=Ceramic, Mount="Surface Mount,PCB", Mouser Description="Cap Ceramic 0.1uF 50V X7R 10% SMD 2.0 x 1.2 mm 125 C Paper T/R", Number of Pins=2, Octopart=https://octopart.com/c0805c104k5ractu-kemet-143926, Packaging="Tape and Reel", Pricing 1="1=0.14000, 10=0.09700, 50=0.05480, 100=0.04540, 500=0.03182, 1000=0.02634 (USD)", Radiation Hardening=No, REACH SVHC="No SVHC", RoHS=TRUE, RoHS Compliant=Yes, Series=C0805C, Stock 1=2903712, Supplier 1=Digi-Key, Temperature Characteristic=X7R, Temperature Range Low=-55°C, Termination=SMD/SMT, Thickness=0.035inch, Width=1.2mm
C18 C19: library part CMP-2007-04344-1, Capacitance=6pF, Case Code (Imperial)=0805, Case Code (Metric)=2012, Dielectric=C0G, Manufacturer="AVX Interconnect / Elco", Manufacturer 1="Kyocera AVX", Max Operating Temperature=125°C, Min Operating Temperature=-55°C, Package Quantity=4000, Supplier Part Number 1=478-11894-1-ND, Voltage Rating=50V, Case/Package=0805, Category="Ceramic Capacitors", ComponentLink1Description=https://datasheet.ciiva.com/205/ccog-205395.pdf?src-supplier=Digi-Key, ComponentLink1URL=https://datasheet.ciiva.com/205/ccog-205395.pdf?src-supplier=Digi-Key, ComponentLink2Description=https://datasheet.ciiva.com/11499/ccog-11499893.pdf?src-supplier=Avnet, ComponentLink2URL=https://datasheet.ciiva.com/11499/ccog-11499893.pdf?src-supplier=Avnet, ComponentLink3Description=https://datasheet.ciiva.com/5424/ccog-5424575.pdf?src-supplier=Mouser, ComponentLink3URL=https://datasheet.ciiva.com/5424/ccog-5424575.pdf?src-supplier=Mouser, Construction=Flat, Depth=1.25mm, Length=2.01mm, Manufacturer Part Number 1=08055A6R0CAT2A, Mount="Surface Mount", Packaging="Tape and Reel", Part Number=08055A6R0CAT2A, Pricing 1="1=0.24000, 10=0.16700, 50=0.10000, 100=0.08440, 500=0.05778, 1000=0.05111 (USD)", Radiation Hardening=No, RoHS=Yes, RoHS Compliant=Yes, Series=-, Stock 1=19844, Supplier 1=Digi-Key, Termination=SMD/SMT, Thickness=0.037inch, Voltage Rating (DC)=50V, Width=0.049inch
C20 C21 C22 C23 C24 C25 C33: library part CMP-2007-03243-2, "CAP CER 10UF 10V X5R 0805", 3DS Part Number=220-00001, Manufacturer=Kemet, Manufacturer Part Number=C0805C106K8PACTU, Package=C0805C-DG, Temperature="-55°C to +85°C", Temperature Characteristic=X5R, Temperature Coefficient=15%, Temperature Range High=+85°C, Temperature Range Low=-55°C, Tolerance=10%, Voltage=10V, Automotive=No, Capacitance=10uF, Category=Cap, ComponentLink2Description=Datasheet, ComponentLink2URL=https://content.kemet.com/datasheets/KEM_C1006_X5R_SMD.pdf, Device Class L1="Passive Components", Device Class L2=Capacitors, Device Class L3="Ceramic Capacitors", Digikey Description="CAP CER 10UF 10V X5R 0805", Height=1.4mm, Ipc Land Pattern Name=CAPC200125X125, Lead Free=Yes, Material=Ceramic, Mouser Description="CAP CER 10UF 10V X5R 0805", Octopart=https://octopart.com/c0805c106k8pactu-kemet-98697, RoHS=TRUE, Voltage Rating=10V
C26 C27: library part CMP-1035-00555-3, "CAP CER 10PF 50V NP0 0603", Capacitance="10 pF", Manufacturer=KEMET, Manufacturer Part Number=C0603C100D5GACTU, Package=C0603C-CF, Temperature="-55°C to +125°C", Temperature Characteristic=C0G, Temperature Coefficient=30ppm/°C, Temperature Range High=+125°C, Temperature Range Low=-55°C, Tolerance="0.5 pF", Voltage Rating="50 V", Automotive=Yes, Automotive Grade="Grade 1", Category=Cap, ComponentLink2Description=Datasheet, ComponentLink2URL=https://api.kemet.com/component-edge/download/datasheet/C0603C100J5GACAUTO.pdf, Device Class L1="Passive Components", Device Class L2=Capacitors, Device Class L3="Ceramic Capacitors", Digikey Description="CAP CER 10PF 50V NP0 0603", Height=0.87mm, Lead Free=Yes, Material=Ceramic, Mouser Description="Multilayer Ceramic Capacitors MLCC - SMD/SMT 50volts 10pF C0G 0.5%", Octopart=https://octopart.com/c0603c100d5gactu-kemet-9143648, RoHS=TRUE
C28 C29: library part CMP-1034-00083-2, Manufacturer=Murata, Part Number=GRM1555C1H1R2WA01D
C30 C32: library part CMP-2008-02743-1, Manufacturer="AVX Interconnect / Elco", Part Number=04026D104KAT2A
C31: library part CMP-08246-005457-1, "CAP CER 4.7UF 6.3V X5R 0402", Case Code (Imperial)=0402, Case Code (Metric)=1005, Dielectric=X5R, Dielectric Material=Ceramic, Max Operating Temperature=85°C, Min Operating Temperature=-55°C, Package Quantity=1, Tolerance=20%, Voltage=6.3V, Capacitance=4.7uF, Case/Package=0402, Construction=Flat, Depth=0.5mm, Dissipation Factor=10%, Height=0.5mm, Lead Free="Lead Free", Length=1mm, Mount="Surface Mount", Packaging="Tape and Reel", Radiation Hardening=No, REACH SVHC="No SVHC", Resistor Type=Ceramic, Series=C, Termination=SMD/SMT, Thickness=0.026inch, Voltage Rating=6.3V, Voltage Rating (DC)=6.3V, Weight=2.3E-05oz, Width=0.02inch
D1: "DIODE SCHOTTKY 20V 1A SOD123FL", Average Rectified Current=1A, Forward Voltage=450mV, Manufacturer 2=MCC, Max Operating Temperature=125°C, Max Reverse Voltage (DC)=20V, Max Surge Current=30A, Min Operating Temperature=-65°C, Package Quantity=1, Supplier Part Number 1=SM5817PL-TPMSCT-ND, Category="Rectifier Diodes", ComponentLink1Description=https://datasheet.ciiva.com/15200/getdatasheetpartid-487494-15200581.pdf?src-supplier=Verical, ComponentLink1URL=https://datasheet.ciiva.com/15200/getdatasheetpartid-487494-15200581.pdf?src-supplier=Verical, ComponentLink2Description=https://datasheet.ciiva.com/912/sm5817pl-sm5819plsod-123fl-912827.pdf?src-supplier=Digi-Key, ComponentLink2URL=https://datasheet.ciiva.com/912/sm5817pl-sm5819plsod-123fl-912827.pdf?src-supplier=Digi-Key, Element Configuration=Single, Manufacturer Part Number 2=SM5817PL-TP, Mount="Surface Mount", Number of Pins=2, Packaging="Tape and Reel", Peak Non-Repetitive Surge Current=30A, Pricing 2="1=0.46000, 10=0.31900, 100=0.16110, 500=0.13144, 1000=0.09752 (USD)", Radiation Hardening=No, Reverse Voltage=20V, RoHS=Yes, RoHS Compliant=Yes, Stock 2=178040, Supplier 1=Digi-Key
D2 D4: library part CMP-22017-000037-1, "LED GREEN CLEAR SMD", Case Code (Imperial)=0805, Case Code (Metric)=2012, Color=Green, Forward Current=30mA, Forward Voltage=2.4V, Lens Color=Colorless, Max Operating Temperature=85°C, Min Operating Temperature=-55°C, Package Quantity=1, Power Dissipation=75mW, Reverse Voltage=5V, Test Current=20mA, Case/Package=0805, Depth=1.25mm, Dominant Wavelength=571nm, Height=0.8mm, Illumination Color=Green, Lead Free="Lead Free", Length=2mm, Lens Style=Rectangular, Lens Transparency=Clear, Luminous Intensity=35mcd, Mount="Surface Mount", Number of Elements=1, Number of LEDs=1, Number of Pins=2, Packaging="Tape and Reel", Power Rating=75mW, Radiation Hardening=No, Viewing Angle=130°, Wavelength=574nm, Width=1.25mm
D5: library part CMP-2000-05096-2, "DIODE SCHOTTKY 40V 1A SMA", Average Rectified Current=1A, Capacitance=110pF, Case/Package=SMA, Forward Voltage=500mV, Manufacturer 1=Diodes, Max Forward Surge Current (Ifsm)=30A, Max Operating Temperature=150°C, Max Repetitive Reverse Voltage (Vrrm)=40V, Max Reverse Current=500uA, Min Operating Temperature=-65°C, Package Quantity=5000, Supplier Part Number 1=B140-FDICT-ND, Category="Rectifier Diodes", ComponentLink1Description=https://datasheet.ciiva.com/15220/getdatasheetpartid-115924-15220197.pdf?src-supplier=Verical, ComponentLink1URL=https://datasheet.ciiva.com/15220/getdatasheetpartid-115924-15220197.pdf?src-supplier=Verical, ComponentLink2Description=https://datasheet.ciiva.com/912/ds13002-912361.pdf?src-supplier=Digi-Key, ComponentLink2URL=https://datasheet.ciiva.com/912/ds13002-912361.pdf?src-supplier=Digi-Key, ComponentLink3Description=https://datasheet.ciiva.com/912/ds13002-912362.pdf?src-supplier=Digi-Key, ComponentLink3URL=https://datasheet.ciiva.com/912/ds13002-912362.pdf?src-supplier=Digi-Key, ComponentLink4Description=https://datasheet.ciiva.com/912/ds13002-912360.pdf?src-supplier=Digi-Key, ComponentLink4URL=https://datasheet.ciiva.com/912/ds13002-912360.pdf?src-supplier=Digi-Key, Contact Plating=Tin, Current Rating=1A, Element Configuration=Single, Forward Current=1A, Height=2.1mm, Lead Free="Lead Free", Length=4.6mm, Manufacturer Part Number 1=B140-13-F, Max Reverse Voltage (DC)=40V, Mount="Surface Mount", Number of Pins=2, Output Current=1A, Packaging="Cut Tape", Peak Non-Repetitive Surge Current=30A, Polarity=Standard, Pricing 1="1=0.41000, 10=0.33200, 100=0.17600, 500=0.11576, 1000=0.07872, 2000=0.07100 (USD)", Radiation Hardening=No, REACH SVHC="No SVHC", RoHS=Yes, RoHS Compliant=Yes, Series=B140, Stock 1=157255, Supplier 1=Digi-Key, Termination=SMD/SMT, Voltage Rating (DC)=40V, Weight=0.004233oz, Width=2.92mm
L1: "Inductor Power Shielded Wirewound 2.2uH 20% 100KHz Ferrite 2.2A 0.0504Ohm DCR 1515 T/R", Case/Package=Nonstandard, Current Rating=2.2A, DC Resistance (DCR)=50.4mR, Inductance=2.2uH, Inductance Tolerance=20%, Manufacturer 1="Taiyo Yuden", Max DC Current=3A, Max Operating Temperature=125°C, Min Operating Temperature=-25°C, Package Quantity=3500, Resistor Type=Wirewound, Self Resonant Frequency=60MHz, Supplier Part Number 1=587-2890-1-ND, Test Frequency=100kHz, Category="Fixed Inductors", ComponentLink1Description=https://datasheet.ciiva.com/8502/nr6028t2r2n-ss-8502679.pdf?src-supplier=Avnet, ComponentLink1URL=https://datasheet.ciiva.com/8502/nr6028t2r2n-ss-8502679.pdf?src-supplier=Avnet, ComponentLink2Description=https://datasheet.ciiva.com/15988/8nr6028t2r2n-15988110.pdf?src-supplier=Onlinecomponents.com, ComponentLink2URL=https://datasheet.ciiva.com/15988/8nr6028t2r2n-15988110.pdf?src-supplier=Onlinecomponents.com, ComponentLink3Description=https://datasheet.ciiva.com/7291/nr6028t2r2n-ss-7291637.pdf?src-supplier=Newark, ComponentLink3URL=https://datasheet.ciiva.com/7291/nr6028t2r2n-ss-7291637.pdf?src-supplier=Newark, ComponentLink4Description=https://datasheet.ciiva.com/1043/wound04-e-1043090.pdf?src-supplier=Digi-Key, ComponentLink4URL=https://datasheet.ciiva.com/1043/wound04-e-1043090.pdf?src-supplier=Digi-Key, ComponentLink5Description=https://datasheet.ciiva.com/1043/wound04-e-1043091.pdf?src-supplier=Digi-Key, ComponentLink5URL=https://datasheet.ciiva.com/1043/wound04-e-1043091.pdf?src-supplier=Digi-Key, ComponentLink6Description=https://datasheet.ciiva.com/1043/wound04-e-1043092.pdf?src-supplier=Digi-Key, ComponentLink6URL=https://datasheet.ciiva.com/1043/wound04-e-1043092.pdf?src-supplier=Digi-Key, ComponentLink7Description=https://datasheet.ciiva.com/8502/nrs4018t2r2mdgj-ss-8502646.pdf?src-supplier=Avnet, ComponentLink7URL=https://datasheet.ciiva.com/8502/nrs4018t2r2mdgj-ss-8502646.pdf?src-supplier=Avnet, ComponentLink8Description=https://datasheet.ciiva.com/7291/nrs4018t2r2mdgj-ss-7291680.pdf?src-supplier=Newark, ComponentLink8URL=https://datasheet.ciiva.com/7291/nrs4018t2r2mdgj-ss-7291680.pdf?src-supplier=Newark, ComponentLink9Description=https://datasheet.ciiva.com/25607/0900766b810b3cd2-25607949.pdf?src-supplier=RSComponents, ComponentLink9URL=https://datasheet.ciiva.com/25607/0900766b810b3cd2-25607949.pdf?src-supplier=RSComponents, Core Material=Ferrite, Depth=4.2mm, Halogen Free="Halogen Free", Height=1.8mm, Height - Seated (Max)=0.071inch, Lead Free="Lead Free", Lead Pitch=2.8mm, Length=4mm, Manufacturer Part Number 1=NRS4018T2R2MDGJ, Mount="Surface Mount", Number of Pins=2, Packaging="Tape and Reel", Pricing 1="1=0.27000, 10=0.23800, 25=0.20840, 50=0.17860, 100=0.16370, 250=0.14884, 500=0.13990, 1000=0.10716 (USD)", Radiation Hardening=No, REACH SVHC=Unknown, RMS Current (Irms)=2.2A, RoHS=Yes, RoHS Compliant=Yes, Saturation Current=3A, Series=NRS, Shielding=Shielded, Stock 1=291635, Supplier 1=Digi-Key, Termination=SMD/SMT, Tolerance=20%, Width=0.157inch
L3: library part CMP-06042-006679-1, "Wire Wound Ferrite RF Inductor For Automotive 77nH ±5% 1100mA 0.09Ω 0402 (1005)", Case Code (Imperial)=0402, Case Code (Metric)=1005, Current Rating=1.1A, DC Resistance (DCR)=90mR, Max Operating Temperature=125°C, Min Operating Temperature=-40°C, Ratings=AEC-Q200, Resistor Type=Wirewound, Self Resonant Frequency=2GHz, Test Frequency=100MHz, Tolerance=5%, Case/Package=0402, Core Material=Ferrite, Height - Seated (Max)=0.024inch, Inductance=77nH, Length=0.039inch, Mount="Surface Mount", Packaging="Tape and Reel", Shielding=Unshielded, Width=0.02inch
L4: library part CMP-06042-001660-1, "Wire Wound RF Inductor 39nH ±5% 530mA 0.456Ω 0402 (1005)", Case Code (Imperial)=0402, Case Code (Metric)=1005, Current Rating=530mA, DC Resistance (DCR)=456mR, Max Operating Temperature=125°C, Min Operating Temperature=-55°C, Package Quantity=1, Resistor Type=Wirewound, Self Resonant Frequency=3.4GHz, Test Frequency=100MHz, Tolerance=5%, Case/Package=0402, Core Material=Non-Magnetic, Height=0.5mm, Height - Seated (Max)=0.024inch, Inductance=39nH, Length=0.039inch, Max DC Current=530mA, Mount="Surface Mount", Packaging="Tape and Reel", Q Factor=28, Shielding=Unshielded, Termination=SMD/SMT, Width=0.024inch
LED1: library part CMP-1426-00011-1, "SMD mono-color Chip LED, WL-SMCW, Red", Case Code (Imperial)=0805, Case Code (Metric)=2012, Color=Red, Forward Current=30mA, Forward Voltage=2V, Manufacturer="Wuerth Elektronik", Manufacturer 1="Wurth Electronics", Max Operating Temperature=85°C, Min Operating Temperature=-40°C, Package Quantity=4000, Supplier Part Number 1=732-4984-1-ND, Test Current=20mA, Case/Package=0805, Category=LEDs, ComponentLink1Description="Manufacturer URL", ComponentLink1URL=http://www.we-online.com, ComponentLink2Description=Datasheet, ComponentLink2URL=http://katalog.we-online.com/led/datasheet/150080RS75000.pdf, ComponentLink3Description=https://datasheet.ciiva.com/22656/150080rs75000-22656961.pdf?src-supplier=Element14, ComponentLink3URL=https://datasheet.ciiva.com/22656/150080rs75000-22656961.pdf?src-supplier=Element14, ComponentLink4Description=https://datasheet.ciiva.com/29279/759435-da-01-en-chipled-0805-w-kl-rot-150080rs75000-29279032.pdf?src-supplier=Conrad, ComponentLink4URL=https://datasheet.ciiva.com/29279/759435-da-01-en-chipled-0805-w-kl-rot-150080rs75000-29279032.pdf?src-supplier=Conrad, Dominant Wavelength=625nm, Height=0.7mm, Length=2mm, Lens Style=Clear,Rectangular, Luminous Intensity=150mcd, Manufacturer Part Number 1=150080RS75000, Mount="Surface Mount", PackageReference=0805_A, Packaging="Tape and Reel", PartNumber=150080RS75000, Pricing 1="1=0.19000, 50=0.17600, 100=0.15100, 500=0.13100 (USD)", REACH SVHC=Unknown, RoHS=Yes, RoHS Compliant=Yes, Stock 1=100282, Supplier 1=Digi-Key, Viewing Angle=140°, Wavelength=625nm, Width=1.25mm
LED2: library part CMP-1426-00007-1, "SMD mono-color Chip LED, WL-SMCW, Green", Case Code (Imperial)=0805, Case Code (Metric)=2012, Color=Green, Forward Current=30mA, Forward Voltage=3.2V, Manufacturer="Wuerth Elektronik", Manufacturer 1="Wurth Electronics", Max Operating Temperature=85°C, Min Operating Temperature=-40°C, Package Quantity=4000, Supplier Part Number 1=732-4983-1-ND, Test Current=20mA, Case/Package=0805, Category=LEDs, ComponentLink1Description="Manufacturer URL", ComponentLink1URL=http://www.we-online.com, ComponentLink2Description=Datasheet, ComponentLink2URL=http://katalog.we-online.com/led/datasheet/150080GS75000.pdf, ComponentLink3Description=https://datasheet.ciiva.com/29563/150080gs75000-29563008.pdf?src-supplier=Digi-Key, ComponentLink3URL=https://datasheet.ciiva.com/29563/150080gs75000-29563008.pdf?src-supplier=Digi-Key, ComponentLink4Description=https://datasheet.ciiva.com/29279/759434-da-01-en-chipled-0805-w-kl-gruen-150080gs75000-29279039.pdf?src-supplier=Conrad, ComponentLink4URL=https://datasheet.ciiva.com/29279/759434-da-01-en-chipled-0805-w-kl-gruen-150080gs75000-29279039.pdf?src-supplier=Conrad, Dominant Wavelength=520nm, Height=0.7mm, Length=2mm, Lens Style=Clear,Rectangular, Luminous Intensity=450mcd, Manufacturer Part Number 1=150080GS75000, Mount="Surface Mount", PackageReference=0805_A, Packaging="Cut Tape", PartNumber=150080GS75000, Pricing 1="1=0.19000, 50=0.17600, 100=0.15100, 500=0.13100 (USD)", REACH SVHC=Unknown, RoHS=Yes, RoHS Compliant=Yes, Stock 1=95801, Supplier 1=Digi-Key, Viewing Angle=140°, Wavelength=520nm, Width=1.25mm
LED3 LED4 LED5 LED6 LED7 LED8: library part Component_1
  LED7: ComponentLink1Description="New link", Manufacture Part Number=QLSP06RGBXWAJ
MD1: library part CMP-12964-000002-1, "RF TXRX MOD BLUETOOTH TRACE ANT", Manufacturer="Cypress Semiconductor", Manufacturer 1=Cypress, Max Frequency=2.5GHz, Max Supply Voltage=3.6V, Min Supply Voltage=1.71V, Package=0, Receiving Current=6.7mA, Supplier Part Number 1=428-4622-1-ND, Temperature="-40°C to +85°C", Temperature Range High=+85°C, Temperature Range Low=-40°C, Transmitting Current=5.7mA, Automotive=No, Bandwidth=100MHz, Category=UNK, ComponentLink2Description=Datasheet, ComponentLink2URL=https://www.cypress.com/file/428336/download, Data Rate=2Mbits/s, Device Class L1="Integrated Circuits (ICs)", Device Class L2="RF Semiconductors and Devices", Device Class L3=Transceivers, Digikey Description="RF TXRX MOD BLUETOOTH TRACE ANT", Height=2mm, Interface=I2C,SPI,UART,I2S,Other, Lead Free=Yes, Manufacturer Part Number=CYBLE-416045-02, Manufacturer Part Number 1=CYBLE-416045-02, Number Of Adc Channels=1, Number Of Gpio=36, Octopart=https://octopart.com/cyble-416045-02-cypress+semiconductor-96386825, Pricing 1="1=16.24000, 10=14.69300, 25=13.53280, 100=12.37280, 250=11.59952 (USD)", RoHS=TRUE, RoHS Compliant=Yes, Stock 1=3441, Supplier 1=Digi-Key
P1: library part CMP-1502-01068-1, "THT Vertical Pin Header WR-PHD, Pitch 2.54 mm, Single Row, 5 pins", Color=Black, Contact Resistance=20mOhm, Manufacturer="Wurth Elektronik", Manufacturer 1="Wurth Electronics", Operating Temperature=-40to105degC, Rated Current=3A, Supplier Part Number 1=732-5318-ND, Withstanding Voltage=500VAC, Working Voltage=250VAC, Category="Headers and Wire Housings", ComponentLink1Description=http://www.farnell.com/cad/1737268.pdf?src-supplier=Element14, ComponentLink1URL=http://www.farnell.com/cad/1737268.pdf?src-supplier=Element14, ComponentLink2Description=https://katalog.we-online.de/em/datasheet/6130xx11121.pdf?src-supplier=Digi-Key, ComponentLink2URL=https://katalog.we-online.de/em/datasheet/6130xx11121.pdf?src-supplier=Digi-Key, Connector Type="Male Pin", Contact Material=Copper, Contact Mating Length=0.236inch, Contact Plating=Gold, Datasheet URL=https://katalog.we-online.de/em/datasheet/6130xx11121.pdf, Gender=Male, Lead Free="Lead Free", Manufacturer Part Number 1=61300511121, Manufacturer URL=http://www.we-online.de, Mount="Through Hole", Mounting Technology=THT, Number of Contacts=5, Number of Positions=5, Number of Rows=1, Orientation=Vertical, Package Reference=61300511121, Packaging=Bag, Part Number=61300511121, Pin Number=5, Pitch=2.54mm, Pricing 1="1=0.26000, 10=0.22200, 25=0.18520, 50=0.15500, 100=0.14100, 1000=0.12800 (USD)", Publisher=WurthElektronik, REACH SVHC=Unknown, RoHS=Yes, RoHS Compliant=Yes, Row Number=Single, Stock 1=41302, Supplier 1=Digi-Key, Termination=Solder
Q1: "MOSFET P-CH 20V 6A SOT23F", Case/Package=SOT-23-3, Continuous Drain Current (ID)=6A, Drain to Source Breakdown Voltage=-20V, Drain to Source Resistance=47.4mR, Drain to Source Voltage (Vdss)=20V, Gate to Source Voltage (Vgs)=8V, Input Capacitance=840pF, Manufacturer 1=Toshiba, Max Operating Temperature=150°C, Max Power Dissipation=1W, Min Operating Temperature=-55°C, Package Quantity=3000, Power Dissipation=2W, Supplier Part Number 1=SSM3J328RLFCT-ND, Category=MOSFETs, ComponentLink1Description=https://datasheet.ciiva.com/11158/ssm3j328r-datasheet-en-20140301-11158652.pdf?src-supplier=Avnet, ComponentLink1URL=https://datasheet.ciiva.com/11158/ssm3j328r-datasheet-en-20140301-11158652.pdf?src-supplier=Avnet, ComponentLink2Description=https://datasheet.ciiva.com/24106/ssm3j328r-datasheet-en-20140301-24106699.pdf?src-supplier=Mouser, ComponentLink2URL=https://datasheet.ciiva.com/24106/ssm3j328r-datasheet-en-20140301-24106699.pdf?src-supplier=Mouser, ComponentLink3Description=https://datasheet.ciiva.com/45425/ssm3j328r-datasheet-en-20140301-45425519.pdf?src-supplier=Digi-Key, ComponentLink3URL=https://datasheet.ciiva.com/45425/ssm3j328r-datasheet-en-20140301-45425519.pdf?src-supplier=Digi-Key, ComponentLink4Description=https://datasheet.ciiva.com/45425/ssm3j328r-datasheet-en-20140301-45425813.pdf?src-supplier=Digi-Key, ComponentLink4URL=https://datasheet.ciiva.com/45425/ssm3j328r-datasheet-en-20140301-45425813.pdf?src-supplier=Digi-Key, Element Configuration=Single, Manufacturer Part Number 1=SSM3J328R,LF, Mount="Surface Mount", Number of Channels=1, Number of Elements=1, Number of Pins=3, Packaging="Tape and Reel", Polarity=P-CHANNEL, Pricing 1="1=0.43000, 10=0.32200, 25=0.29040, 100=0.20060, 500=0.13728, 1000=0.10560 (USD)", Radiation Hardening=No, Rds On Max=29.8mR, RoHS=Yes, RoHS Compliant=Yes, Stock 1=476474, Supplier 1=Digi-Key, Turn-Off Delay Time=107ns, Turn-On Delay Time=32ns
Q3 Q4 Q5 Q6: library part CMP-35916-000013-1, "MOSFET N CH 30V 3.5A 2-3Z1A", Case/Package=SOT-23-3, Continuous Drain Current (ID)=3.5A, Drain to Source Breakdown Voltage=30V, Drain to Source Resistance=290mR, Gate to Source Voltage (Vgs)=12V, Input Capacitance=123pF, Max Power Dissipation=1W, Package Quantity=3000, Drain to Source Voltage (Vdss)=30V, Mount="Surface Mount", Packaging="Tape and Reel", Power Dissipation=1W, Rds On Max=126mR
R1: library part RES_0805_K_030.00, "Res Thick Film 0805 30K Ohm 1% 0.125W(1/8W) ±100ppm/°C Pad SMD Automotive T/R", Case Code (Imperial)=0805, Case Code (Metric)=2012, Manufacturer 1=Panasonic, Manufacturer Part Number 1=ERJ-6ENF3002V, Max Operating Temperature=155°C, Max Power Dissipation=125mW, Min Operating Temperature=-55°C, Package Quantity=1, Resistance Tolerance=1%, Resistor Type="Thick Film", Supplier Part Number 1=P30.0KCCT-ND, Temperature Coefficient=100ppm/°C, Voltage Rating=150V, Case/Package=0805, Category="Chip SMD Resistors", ComponentLink1Description=https://datasheet.ciiva.com/11821/0900766b80f80784-11821600.pdf?src-supplier=RSComponents, ComponentLink1URL=https://datasheet.ciiva.com/11821/0900766b80f80784-11821600.pdf?src-supplier=RSComponents, ComponentLink2Description=https://datasheet.ciiva.com/9117/aoa0000ce2-9117485.pdf?src-supplier=Avnet, ComponentLink2URL=https://datasheet.ciiva.com/9117/aoa0000ce2-9117485.pdf?src-supplier=Avnet, ComponentLink3Description=https://datasheet.ciiva.com/24124/aoa0000ce2-24124393.pdf?src-supplier=Mouser, ComponentLink3URL=https://datasheet.ciiva.com/24124/aoa0000ce2-24124393.pdf?src-supplier=Mouser, ComponentLink4Description=https://datasheet.ciiva.com/30169/aoa0000ce2-30169447.pdf?src-supplier=Onlinecomponents.com, ComponentLink4URL=https://datasheet.ciiva.com/30169/aoa0000ce2-30169447.pdf?src-supplier=Onlinecomponents.com, ComponentLink5Description=https://datasheet.ciiva.com/17210/aoa0000ce2-17210478.pdf?src-supplier=Avnet+Europe, ComponentLink5URL=https://datasheet.ciiva.com/17210/aoa0000ce2-17210478.pdf?src-supplier=Avnet+Europe, ComponentLink6Description=https://datasheet.ciiva.com/22673/1678782-22673293.pdf?src-supplier=Element14, ComponentLink6URL=https://datasheet.ciiva.com/22673/1678782-22673293.pdf?src-supplier=Element14, ComponentLink7Description=https://datasheet.ciiva.com/28565/1694929-28565193.pdf?src-supplier=Element14, ComponentLink7URL=https://datasheet.ciiva.com/28565/1694929-28565193.pdf?src-supplier=Element14, ComponentLink8Description=https://datasheet.ciiva.com/46441/1678782-46441405.pdf?src-supplier=Element14, ComponentLink8URL=https://datasheet.ciiva.com/46441/1678782-46441405.pdf?src-supplier=Element14, ComponentLink9Description=https://datasheet.ciiva.com/46441/1678782-46441406.pdf?src-supplier=Element14, ComponentLink9URL=https://datasheet.ciiva.com/46441/1678782-46441406.pdf?src-supplier=Element14, ComponentLink10Description=https://datasheet.ciiva.com/16512/aoa0000ce2-16512236.pdf?src-supplier=Avnet+Asia, ComponentLink10URL=https://datasheet.ciiva.com/16512/aoa0000ce2-16512236.pdf?src-supplier=Avnet+Asia, ComponentLink11Description=https://datasheet.ciiva.com/7711/1678782-7711062.pdf?src-supplier=Element14, ComponentLink11URL=https://datasheet.ciiva.com/7711/1678782-7711062.pdf?src-supplier=Element14, Construction=Rectangular, Contact Plating=Tin, Depth=1.25mm, Features="Automotive AEC-Q200", Height=0.6mm, Lead Free="Lead Free", Length=2mm, Military Standard=Not, Mount="Surface Mount", Number of Terminations=2, Packaging="Tape and Reel", Power Rating=125mW, Pricing 1="1=0.10000, 10=0.07500, 100=0.02880, 1000=0.01265, 2500=0.01092 (USD)", Radiation Hardening=No, REACH SVHC=Unknown, Resistance=30K, RoHS=Yes, RoHS Compliant=Yes, Series=ERJ, Stock 1=296893, Supplier 1=Digi-Key, Technology="THICK FILM", Termination=SMD/SMT, Tolerance=1%, Voltage Rating (DC)=150V, Weight=0.000194oz, Width=0.049inch